# Altium PCB tps563209_12v_to5v.PcbDoc
Units mil, origin at the board's own origin, x right, y up, seen from the top; angles counter-clockwise.
Board outline 2000 x 2400 mil, 4 copper layers (Top Layer, MidLayer1, MidLayer2, Bottom Layer); 11 components, 6 nets, 22 pads, 32 vias.
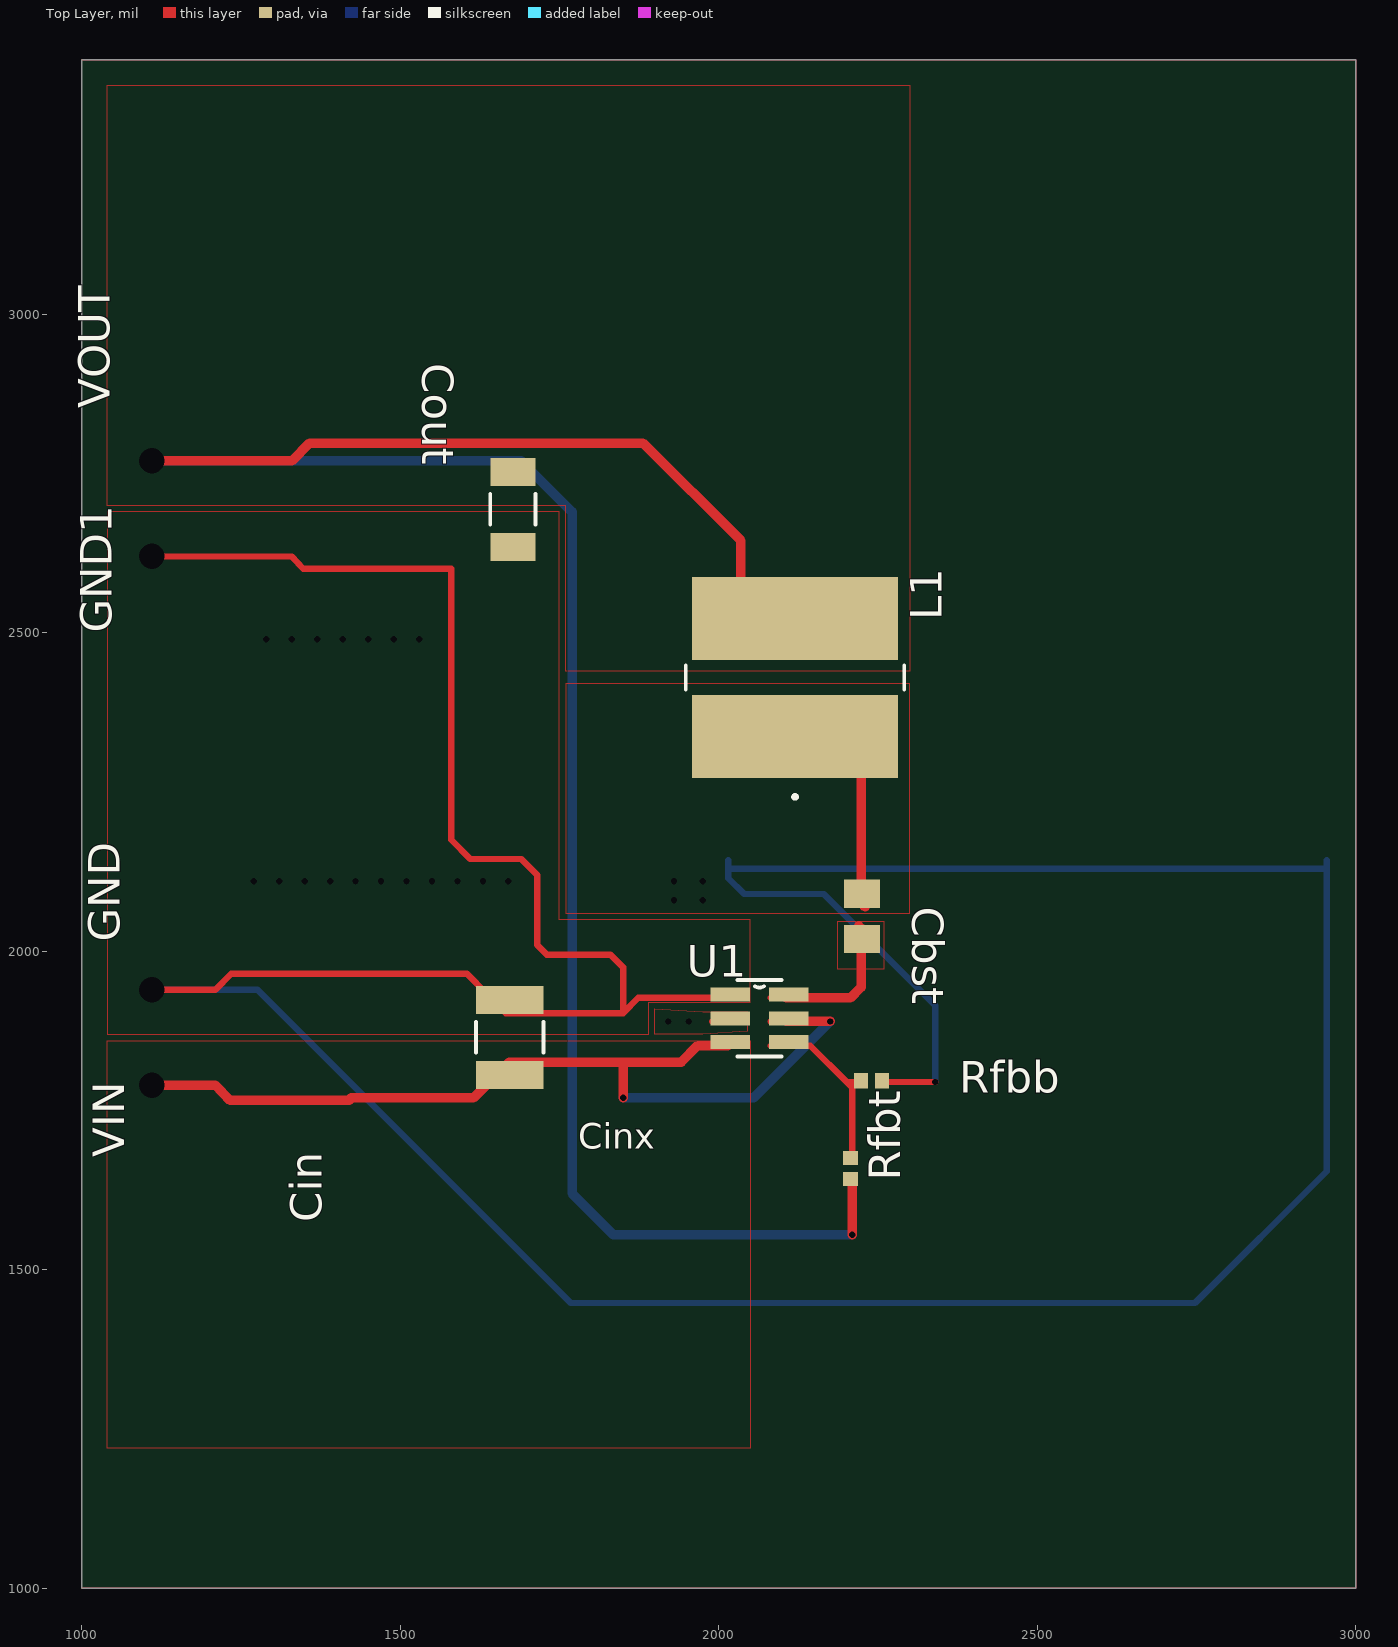
[diagram p0: Top Layer view]
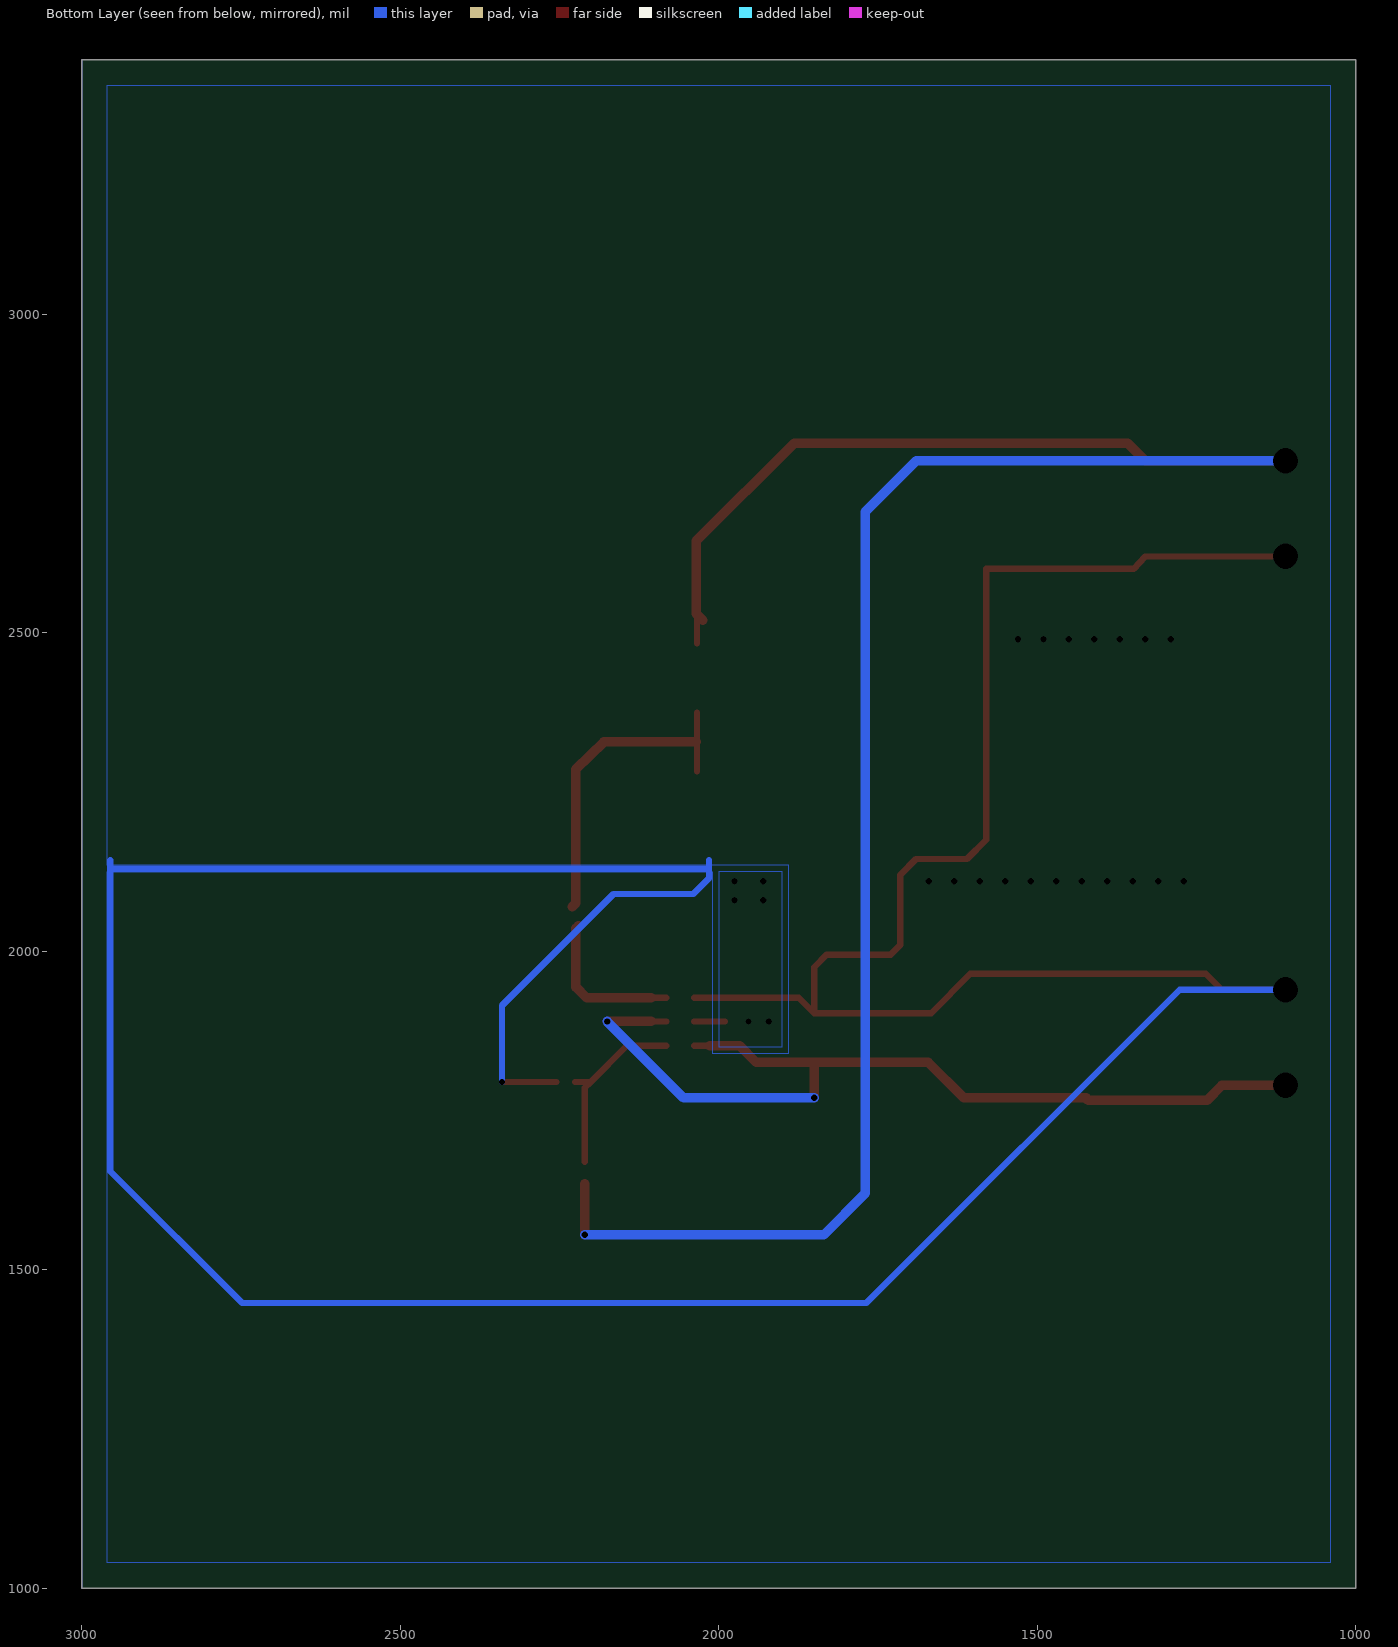
[diagram p1: Bottom Layer view, seen from below]

## Layer stack, top to bottom
Top Layer: signal copper 1.4
Dielectric: core 12.6, FR-4, Dk 4.8
MidLayer1: signal copper 1.4
Dielectric: prepreg 12.6, FR-4, Dk 4.8
MidLayer2: signal copper 1.4
Dielectric: core 12.6, FR-4, Dk 4.8
Bottom Layer: signal copper 1.4

## Board outline
1000,1000 3000,1000 3000,3400 1000,3400

## Design rules (kind name [scope] priority, off if disabled: settings)
PlaneConnect [All] p0: scope1count=1 scope1_0_kind=Board scope1_0_value=Board scope2count=1 scope2_0_kind=Board scope2_0_value=Board commentlength=0 planeconnectstyle=Direct reliefexpansion=20 reliefentries=4 reliefconductorwidth=10 reliefairgap=10
PlaneConnect [All] p1: planeconnectstyle=Direct reliefexpansion=20 reliefentries=4 reliefconductorwidth=10 reliefairgap=10
PolygonConnect [All] p0: scope1count=1 scope1_0_kind=Board scope1_0_value=Board scope2count=1 scope2_0_kind=Board scope2_0_value=Board commentlength=0 connectstyle=Direct reliefconductorwidth=10 reliefentries=4 polygonreliefangle="90 Angle"
PolygonConnect [All] p1: connectstyle=Direct reliefconductorwidth=10 reliefentries=4 polygonreliefangle="90 Angle"

## Components (designator, comment, footprint, x,y, rotation, side; value= is the part's Value field where it differs from the comment)
Cbst "" 0805 2225,2055 r270 top
Cin "" 1210 1672,1865 r90 top
Cout "" 1206 1677,2694 r270 top
GND "" TP-1502 1108,1939 r90 top
GND1 "" TP-1502 1108,2620 r90 top
L1 "" VLP8040 2120,2430 r90 top
Rfbb "" 0402 2240,1797 r0 top
Rfbt "" 0402 2207,1659 r90 top
U1 "" DDC0006A 2064,1895 r0 top
VIN "" TP-1502 1108,1788 r90 top
VOUT "" TP-1502 1108,2769 r90 top

## Footprints (in the part's own frame and the unit in brackets; to place one, negate y for a bottom-side part, rotate by r counter-clockwise, add the part's x,y. Pads: shape width x height; smd on the part's side, far side on the other; paste and mask are expansions set on the pad)
0402 [mil]
  rect 22x24 smd: 1(-16.5,0) 2(16.5,0)
0805 [mil]
  rect 44x57 smd: 1(-35.5,0) 2(35.5,0)
1206 [mil]
  rect 44x71 smd: 1(-59,0) 2(59,0)
  silkscreen extent -24,-36 24,36
1210 [mil]
  rect 44x106 smd: 1(-59,0) 2(59,0)
  silkscreen extent -24,-53 24,53
DDC0006A [mil]
  rect 62x22 smd: 1(-46,37.4) 2(-46,0) 3(-46,-37.4) 4(46,-37.4) 5(46,0) 6(46,37.4)
  silkscreen extent -34,-60 34,60
TP-1502 [mil]
  round 0 hole 32: 1(0,0)
VLP8040 [mil]
  rect 130x323 smd: 1(-92.5,0) 2(92.5,0)
  silkscreen extent -190,-172 19,172

## Via types
v1: diameter 0, hole 10, Top Layer to Bottom Layer, 28 vias
v2: diameter 0, hole 40, Top Layer to Bottom Layer, 4 vias

## Nets (pads, with @x,y where several pads share a name; then routed paths per layer and width w, separated by ;. In a path a pad name is that pad's centre, name@x,y a point inside that pad or via, vN(x,y) a via of type N, cw(c..) or ccw(c..) an arc to the next point about the centre after c; other vN are vias at no path point)
0: Cin.2 Cout.2 GND1.1 GND.1 Rfbb.2 U1.1 | length 6595.1
  Top Layer w10: v2(1110,1940) 1210,1940 1235,1965 1605,1965 1666,1903 1850,1903 ; v2(1110,2620) 1330,2620 1348,2601 1580,2601 1580,2175 1610,2145 1690,2145 1715,2120 1715,2010 1730,1995 1830,1995 1850,1975 1850,1903 ; U1.1@1990,1927 U1.1@2038,1927 ; U1.1@2014,1927 1874,1927 1850,1903 ; Rfbb.2@2255,1795 2278,1795 v1(2340,1795)
  Bottom Layer w10: v2(1110,1940) 1276,1940 1768,1448 2748,1448 2955,1655 2955,2130 ; 2015,2143 2015,2130 ; v1(2340,1795) 2340,1915 2165,2090 2040,2090 2015,2115 2015,2130 ; 2955,2143 2955,2130 ; 2015,2130 2955,2130
  other v1: 1270,2110 1310,2110 1350,2110 1390,2110 1430,2110 1470,2110 1510,2110 1550,2110 1590,2110 1630,2110 1670,2110 1290,2490 1330,2490 1370,2490 1410,2490 1450,2490 1490,2490 1530,2490
3: Rfbb.1 Rfbt.2 U1.4 | length 319.3
  Top Layer w10: U1.4@2082,1852 U1.4@2130,1852 ; U1.4@2106,1852 2144,1852 2201,1795 ; Rfbt.2@2210,1670 2210,1693 2210,1786 2201,1795 ; Rfbb.1@2225,1795 2201,1795
5: Cbst.1 L1.1 U1.2 | length 565
  Top Layer w10: U1.2@1990,1890 U1.2@2038,1890 ; L1.1@2034,2283 L1.1@2034,2375
  Top Layer w15: L1.1@2035,2329 2180,2329 2224,2286 2224,2095 2224,2076 Cbst.1@2230,2070
  other v1: 1921,1890 1953,1890 1930,2080 1975,2080 1930,2110 1975,2110
6: Cout.1 L1.2 Rfbt.1 VOUT.1 | length 3530.9
  Top Layer w10: L1.2@2034,2484 L1.2@2034,2576
  Top Layer w15: v2(1110,2770) 1330,2770 1358,2798 1580,2798 1881,2798 2035,2645 2035,2530 L1.2@2025,2520 ; v1(2210,1555) 2210,1616 Rfbt.1@2210,1635
  Bottom Layer w15: v2(1110,2770) 1690,2770 1770,2690 1770,1620 1835,1555 v1(2210,1555)
10: Cbst.2 U1.6 | length 270.7
  Top Layer w10: U1.6@2082,1927 U1.6@2130,1927
  Top Layer w15: U1.6@2106,1927 2207,1927 2224,1944 2224,2015 2224,2036 Cbst.2@2220,2040
11: Cin.1 U1.3 U1.5 VIN.1 | length 1545.9
  Top Layer w10: U1.3@1990,1852 U1.3@2038,1852 ; U1.5@2082,1890 U1.5@2130,1890
  Top Layer w15: v2(1110,1790) 1210,1790 1233,1766 1420,1766 1423,1770 1615,1770 1671,1826 1850,1826 ; v1(1850,1770) 1850,1826 ; U1.3@2014,1852 1967,1852 1941,1826 1850,1826 ; U1.5@2106,1890 v1(2175,1890)
  Bottom Layer w15: v1(1850,1770) 2055,1770 v1(2175,1890)

## Polygon pours and split planes (outlines as drawn)
10 on Top Layer " " (solid, pour order 0): 2187,1972 2187,2047 2259,2047 2259,1972
5 on Top Layer " " (solid, pour order 2): 2045,1875 1975,1870 1900,1870 1900,1910 1975,1905 2045,1905
11 on Top Layer " " (solid, pour order 3): 1040,1860 2050,1860 2050,1220 1040,1220
5 on Top Layer " " (solid, pour order 4): 2300,2420 1760,2420 1760,2060 2300,2060
6 on Top Layer " " (solid, pour order 5): 2300,2440 1760,2440 1760,2700 1040,2700 1040,3360 2300,3360
0 on Top Layer " " (solid, pour order 7): 1040,1870 1890,1870 1890,1920 2050,1920 2050,2050 1750,2050 1750,2690 1040,2690
5 on Bottom Layer " " (solid, pour order 1): 1900,2125 2000,2125 2000,1850 1900,1850
0 on Bottom Layer " " (solid, pour order 6): 1890,2135 2960,2135 2960,3360 1040,3360 1040,1040 2960,1040 2960,2125 2010,2125 2010,1840 1890,1840

## Other copper
Multi-Layer:
  the board outline again, w1

## Silkscreen, mask and mechanical layers (free items; w line width, h text height)
Top Overlay:
  text "Cinx" at 1780,1690 h40